# EAGLE board driver_IlhamWidyoNugroho_21507334002_GK1 (EAGLE 9.6.2)
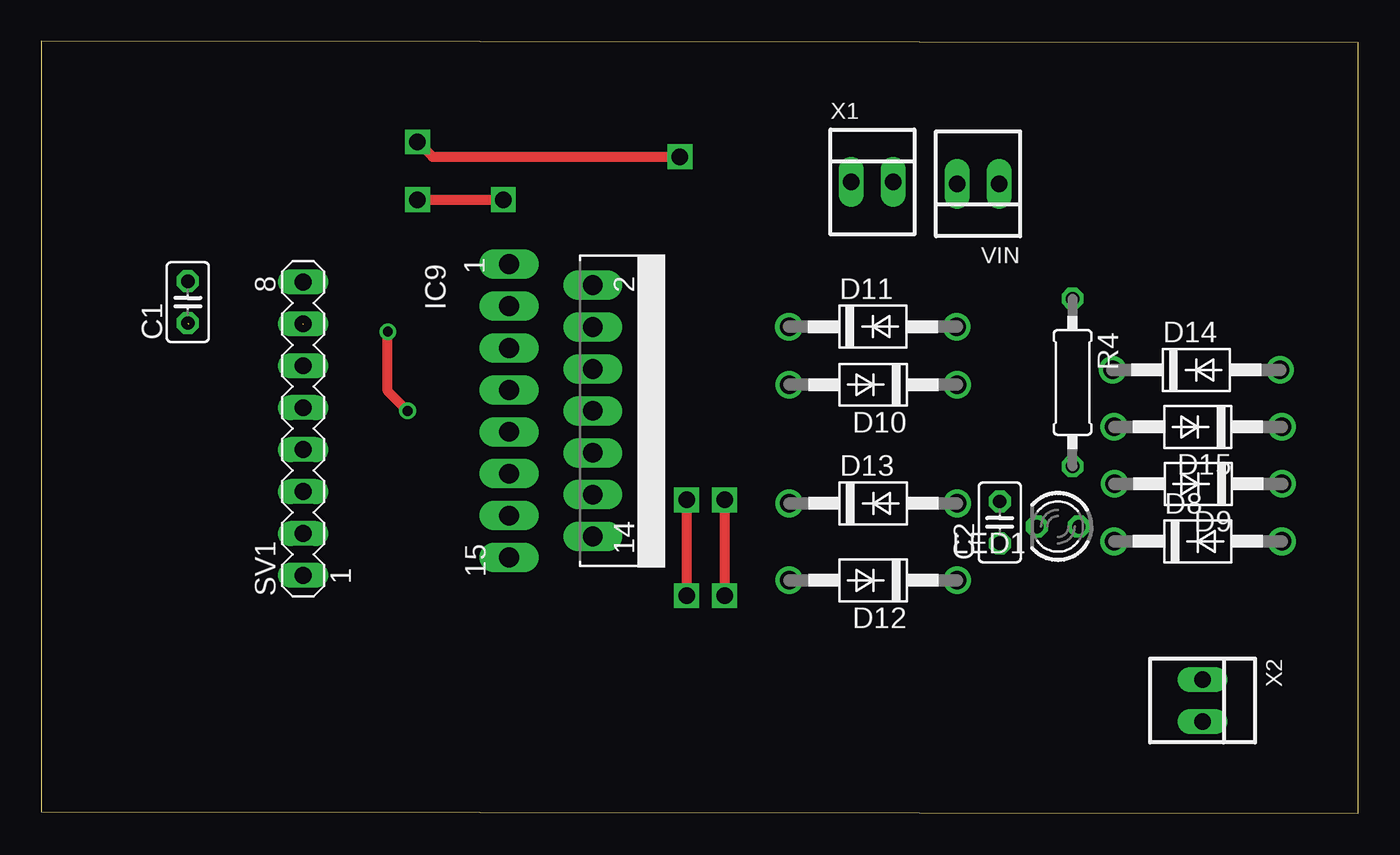
[diagram p0: board, top side]
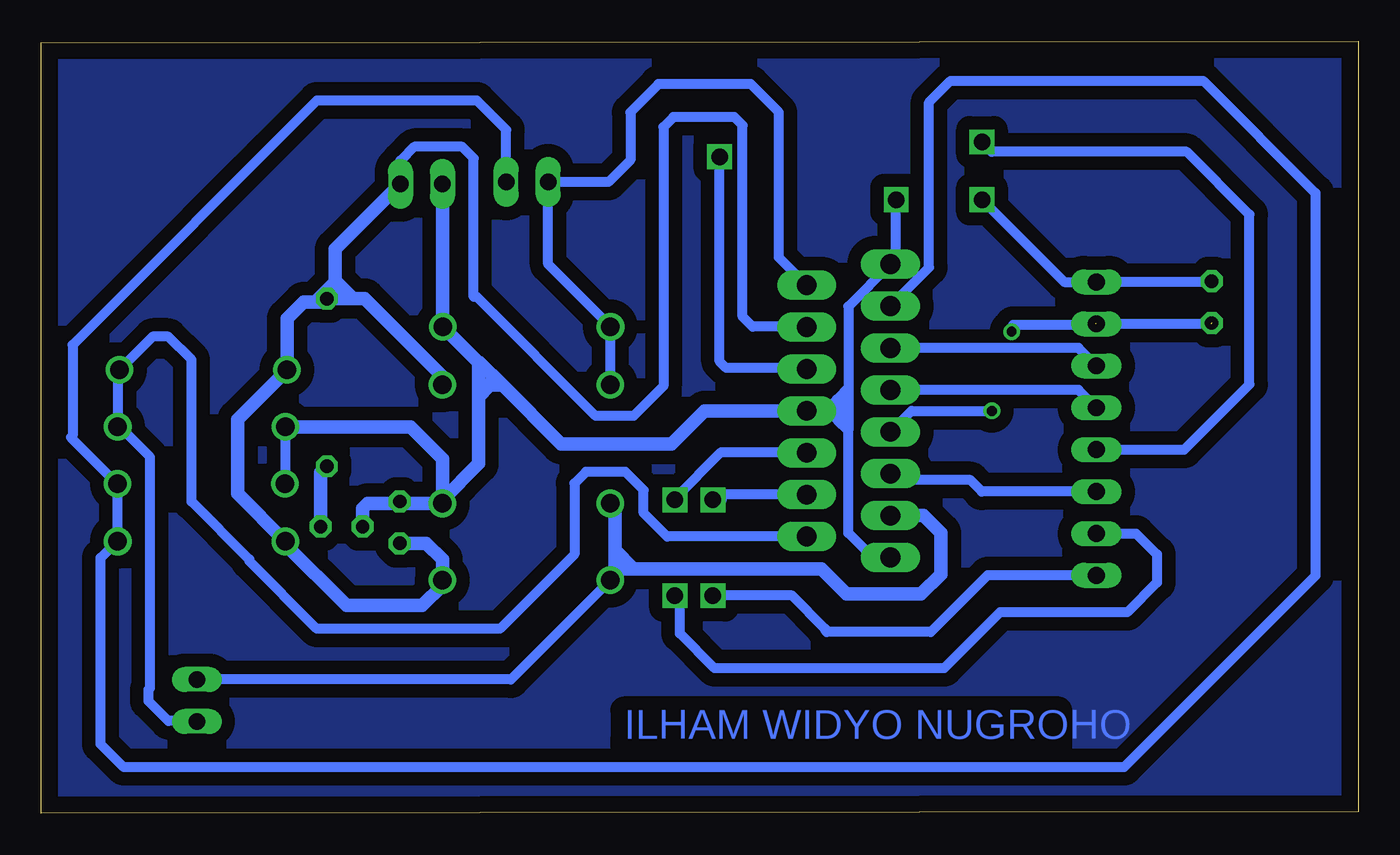
[diagram p1: board, bottom side, seen from below]

Size 79.8 x 46.8 mm. Coordinates in mm from the lower left corner, seen from the top.
Outline: 0,0.1 79.8,0 79.8,46.7 0,46.8 0,0.1
Copper layers (1*16): Top 0.035mm / dielectric 1.5mm / Bottom 0.035mm
Design rules "default": minimum track width 6mil, minimum drill 0.35mm, track to track 6mil, track to pad 6mil, pad to pad 6mil, via to via 6mil, smd to smd 6mil, copper to edge 40mil, drill to drill 6mil, minimum pad ring 10mil, minimum via ring 8mil, stop-mask expansion 4mil, vias tented up to drill 0mil, thermal gap 10mil

## Footprints (pad centres in the part's own frame; a part is rotated, then mirrored left to right if it is on the bottom)
C025-025X050 = drill 0.813 octagon: 1 -1.27,0; 2 1.27,0
DO41-10 = drill 1.118: A 5.08,0; C -5.08,0
MULTIWATT-15 = drill 1.2 long: 1 -8.89,-7.62; 2 -7.62,-2.54; 3 -6.35,-7.62; 4 -5.08,-2.54; 5 -3.81,-7.62; 6 -2.54,-2.54; 7 -1.27,-7.62; 8 0,-2.54; 9 1.27,-7.62; 10 2.54,-2.54; 11 3.81,-7.62; 12 5.08,-2.54; 13 6.35,-7.62; 14 7.62,-2.54; 15 8.89,-7.62
LED3MM = drill 0.813 octagon: A -1.27,0; K 1.27,0
0207/10 = drill 0.813 octagon: 1 -5.08,0; 2 5.08,0
MA08-1 = drill 1.016 long: 1 -8.89,0; 2 -6.35,0; 3 -3.81,0; 4 -1.27,0; 5 1.27,0; 6 3.81,0; 7 6.35,0; 8 8.89,0
22-23-2021 = drill 1 long: 1 -1.27,0; 2 1.27,0

## Placement (x,y rotation side)
C1  100nF  [C025-025X050]  8.88,30.99 90 top
C2  100nF  [C025-025X050]  58.08,17.64 90 top
D8  1N4004  [DO41-10]  70.09,16.49 0 top
D9  1N4004  [DO41-10]  70.11,19.98 180 top
D10  1N4004  [DO41-10]  50.41,25.98 180 top
D11  1N4004  [DO41-10]  50.39,29.5 0 top
D12  1N4004  [DO41-10]  50.41,14.13 180 top
D13  1N4004  [DO41-10]  50.41,18.79 0 top
D14  1N4004  [DO41-10]  69.99,26.88 0 top
D15  1N4004  [DO41-10]  70.09,23.43 180 top
IC9  L298  [MULTIWATT-15]  35.96,24.4 270 top
LED1  [LED3MM]  61.6,17.39 180 top
R4  330  [0207/10]  62.49,26.12 270 top
SV1  [MA08-1]  15.87,23.32 90 top
VIN  22-23-2021  [22-23-2021]  56.76,38.16 180 top
X1  22-23-2021  [22-23-2021]  50.36,38.27 0 top
X2  22-23-2021  [22-23-2021]  70.37,6.85 270 top

## Library data of the parts
C1 C2 R4 = rcl
D8-D15 = diode
IC9 = st-microelectronics
LED1 = led
SV1 = con-lstb; OC_FARNELL: unknown; OC_NEWARK: unknown
VIN X1 X2 = con-molex; MF: MOLEX; MPN: 22-23-2021; OC_FARNELL: 1462926; OC_NEWARK: 25C3832

## Nets
GND: C1.2 C2.2 D9.A D11.A D13.A D15.A IC9.1 IC9.8 IC9.15 LED1.K SV1.8 VIN.2
N$1: IC9.5 SV1.6
N$3: IC9.7 SV1.5
N$5: IC9.12 SV1.1
N$8: IC9.10 SV1.2
N$16: IC9.6 SV1.4
N$17: IC9.11 SV1.3
N$44: LED1.A R4.2
N$204: D8.A D9.C IC9.3 X1.2
N$205: D10.A D11.C IC9.2 X1.1
N$206: D12.A D13.C IC9.13 X2.1
N$207: D14.A D15.C IC9.14 X2.2
VCC: C1.1 IC9.9 SV1.7
VDD: C2.1 D8.C D10.C D12.C D14.C IC9.4 R4.1 VIN.1

## Tracks (layer width: path | path; a pad name or v marks a point on that pad's centre or on a via)
GND  (via drill 1)
  Top 0.61: v22.8,37.2 v28,37.2
  Bottom 0.61: IC9.15 29.41,15.51 30.9,17 30.9,23.2 | 30.9,23.2 31.55,23.85 | 31.55,23.85 32.1,24.4 32.3,24.4 | 30.9,25.8 30.9,25.1 | 30.9,25.1 30.9,24.5 | 30.9,24.5 30.9,23.2 | 30.9,25.8 31.6,25.1 | 31.6,25.1 32.2,24.5 | 32.3,24.4 IC9.8 | 30.9,24.5 32.2,24.5 | 32.2,24.5 32.3,24.4 | 30.9,25.1 31.6,25.1 | 31.55,23.85 30.9,24.5 | v28,37.2 28,33.63 IC9.1 30.9,30.73 30.9,25.8 | v22.8,37.2 17.81,32.21 SV1.8 8.93,32.21 C1.2 | D15.A 65.03,23.41 D9.A
  Bottom 0.813: LED1.K 60.33,18.49 60.03,18.79 D13.A | D13.A 55.49,21.49 57.43,23.43 D15.A | 65.08,19.98 D9.A | VIN.2 55.47,33.26 D11.A 53.3,27.33 | 53.3,25.25 53.3,21.2 55.49,19.01 D13.A | 53.3,25.25 53.3,25.8 | 53.3,25.8 53.3,27.33 | 53.3,27.33 53.23,27.33 51.85,25.95 | 51.85,25.95 48.3,22.4 41.6,22.4 39.6,24.4 IC9.8 | 51.85,25.95 52.6,25.95 | 52.6,25.95 53.15,25.95 53.3,25.8 | 52.6,25.95 53.3,25.25 | C2.2 57.96,18.79 D13.A | IC9.15
N$1
  Bottom 0.61: SV1.6 16.95,28.21 IC9.5
N$3
  Bottom 0.61: SV1.5 16.95,25.67 IC9.7
N$5  (via drill 1)
  Top 0.61: v39.1,19 v39.1,13.2
  Bottom 0.61: SV1.1 22.47,14.43 25.9,11 32.2,11 32.3,11.1 32.3,11.2 34.3,13.2 v39.1,13.2 | IC9.12 38.78,19.32 v39.1,19
  Bottom 0.813: v39.1,13.2 39,13.1 | v39.1,19 38.7,19 38.68,19.02
N$8  (via drill 1)
  Top 0.61: v41.4,19 v41.4,13.2
  Bottom 0.61: v41.4,19 41.4,19.1 38.6,21.9 33.46,21.9 IC9.10 | SV1.2 13.47,16.97 12.2,15.7 12.2,14 14,12.2 21.7,12.2 25.1,8.8 39,8.8 41.1,10.9 41.1,12.9 v41.4,13.2
N$16  (via drill 1)
  Top 0.61: v22.8,40.7 23.7,39.8 v38.7,39.8
  Bottom 0.61: SV1.4 10.55,22.05 6.6,26 6.6,36.3 10.4,40.1 22.2,40.1 v22.8,40.7 | IC9.6 33.48,27 38.3,27 38.7,27.4 v38.7,39.8
N$17
  Bottom 0.61: SV1.3 22.81,19.51 23.5,20.2 27.95,20.2 IC9.11
N$44
  Bottom 0.813: R4.2 62.87,20.66 LED1.A
N$204
  Bottom 0.61: X1.2 51.63,41.43 53.4,43.2 63.1,43.2 77.9,28.4 77.9,22.9 78,22.8 78,22.79 D9.C | 75.17,19.96 D8.A 75.21,16.49 76.2,15.5 76.2,4.2 74.8,2.8 14.2,2.8 2.6,14.4 2.6,37.6 9.4,44.4 24.7,44.4 26,43.1 26,33.09 IC9.3
  Bottom 0.813: 75.17,19.96 D9.C
N$205
  Bottom 0.61: D10.A 45.33,29.48 D11.C 49.09,33.28 X1.1 45.43,38.27 44.1,39.6 44.1,42.5 42.4,44.2 36.8,44.2 35.1,42.5 35.1,33.7 IC9.2
  Bottom 0.813: 45.31,26 D10.A
N$206
  Bottom 0.61: D12.A 51.34,8.12 X2.1
  Bottom 0.813: D13.C 45.03,18.49 45.03,15.96 | 45.03,15.96 45.03,14.43 D12.A 44.63,14.83 43.9,14.83 | IC9.13 26.35,18.05 25.3,17 25.3,14.5 26.5,13.3 31,13.3 32.53,14.83 43.9,14.83 | 43.9,14.83 45.03,15.96
N$207
  Bottom 0.61: X2.2 70.39,5.6 72.1,5.6 73.3,6.8 73.3,7.5 73.2,7.6 73.2,21.6 75.03,23.43 D15.C 75.17,26.78 D14.A 73.05,28.9 72.1,28.9 70.7,27.5 70.7,18.9 67.2,15.4 67.2,15.3 63.1,11.2 52,11.2 47.5,15.7 47.5,20 46.8,20.7 44.4,20.7 43.3,19.6 43.3,18.2 41.88,16.78 IC9.14
  Bottom 0.813: 75.07,23.53 D15.C
S$1
  pour Bottom (isolate 0.813): 0,46.9 -0.2,46.9 -0.2,0.1 79.9,0.1 79.9,46.7
VCC  (via drill 0.6)  (2 unrouted)
  Top 0.61: v21,29.2 21,25.6 v22.2,24.4
  Bottom 0.61: 8.93,29.67 SV1.7 | 15.9,29.7 16,29.6 20.9,29.6 21,29.3 v21,29.2 | IC9.9 27.07,24.4 v22.2,24.4
VDD
  Bottom 0.61: IC9.4 33.44,29.5 36.7,29.5 37.3,30.1 37.3,41.7 37.8,42.2 41.5,42.2 42.1,41.6 42.1,25.9 43.9,24.1 46.2,24.1 53.4,31.3 53.6,31.3 53.6,39.7 54.3,40.4 57.2,40.4 58.03,39.57 VIN.1
  Bottom 0.813: D10.C 55.49,26.48 60.21,31.2 60.9,31.2 | R4.1 62.71,31.2 62.51,31 63.2,31 | 63.2,31 63.9,31 64.91,29.99 D14.C 67.9,23.89 67.9,19.38 D8.C 65.01,16.31 61.3,12.6 56.72,12.6 55.49,13.83 D12.C 55.49,15.39 56.47,16.37 C2.1 | R4.1 60.9,31.2 | R4.1 61.99,31.7 61.99,32.21 | 61.99,32.29 61.99,34.2 VIN.1 58.03,39.33 | 60.9,31.2 61.99,32.29 | 61.99,32.29 61.99,32.21 | 61.99,32.21 63.2,31

## Text on the board
Bottom: ILHAM WIDYO NUGROHO